# Altium PCB HamamatsuSensorBoard.PcbDoc
Units mil, origin at the board's own origin, x right, y up, seen from the top; angles counter-clockwise.
Board outline 395 x 405 mil, 2 copper layers (Top Layer, Bottom Layer); 4 components, 9 nets, 23 pads, 13 vias.
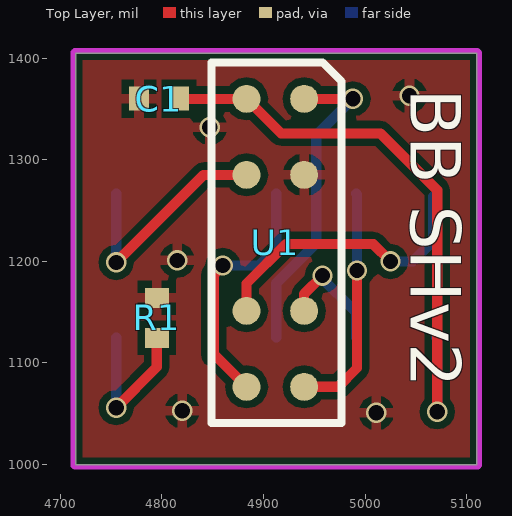
[diagram p0: Top Layer view]
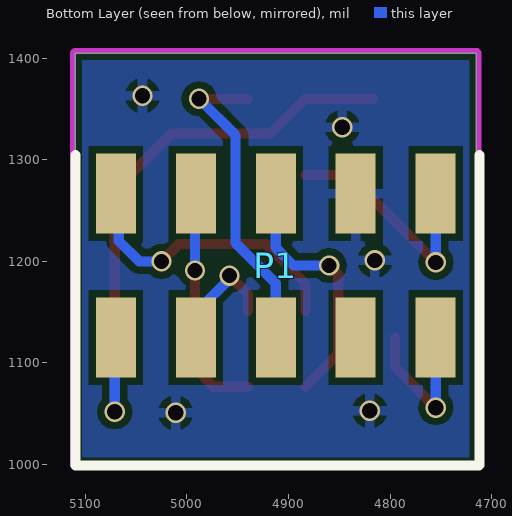
[diagram p1: Bottom Layer view, seen from below]

## Layer stack, top to bottom
Top Layer: signal copper 1.4
Dielectric: dielectric 12.6, FR-4, Dk 4.8
Bottom Layer: signal copper 1.4

## Board outline
4715,1000 5110,1000 5110,1405 4715,1405

## Design rules (kind name [scope] priority, off if disabled: settings)
Clearance [All] p1: gap=7
HoleToHoleClearance [All] p1: gap=7 allowstackedmicrovias=TRUE
MinimumSolderMaskSliver [All] p1: minsoldermaskwidth=7
PlaneClearance [All] p1: clearance=10
PolygonConnect [All] p1: connectstyle=Relief reliefconductorwidth=10 reliefentries=4 polygonreliefangle="90 Angle"
RoutingLayers [InNet('GND')] p1: top layer_v5=FALSE bottom layer_v5=FALSE
RoutingVias [All] p1: holewidth=11 width=15 viastyle="Through Hole" minholewidth=11 minwidth=15 maxholewidth=500 maxwidth=500
SilkToSilkClearance [All] p1: silktosilkclearance=4
SilkscreenOverComponentPads [All] p1: minsilkscreentomaskgap=5
SolderMaskExpansion [All] p1: expansion=4
Width [All] p1: maxlimit=50 minlimit=7 preferedwidth=10
22 further rules are at their usual default settings.

## Classes and differential pairs
component class HamamatsuSensorBoard: C1 R1 U1

## Components (designator, comment, footprint, x,y, rotation, side; value= is the part's Value field where it differs from the comment)
C1 "Cap" C_0402 4817,1360 r180 top
P1 "Header 10" 609-4377-ND 5070,1125 r180 bottom
R1 "Res2" R_0402 4795,1125 r90 top
U1 "S10226" S10226 4940,1360 r270 top

## Footprints (in the part's own frame and the unit in brackets; to place one, negate y for a bottom-side part, rotate by r counter-clockwise, add the part's x,y. Pads: shape width x height; smd on the part's side, far side on the other; paste and mask are expansions set on the pad)
609-4377-ND [mm]
  rect 1x2 smd: 1(8,3.6) 2(6,3.6) 3(4,3.6) 4(2,3.6) 5(0,3.6) 6(0,0) 7(2,0) 8(4,0) 9(6,0) 10(8,0)
  silkscreen extent -1.01,-3.2 9.09,4.57
C_0402 [mm]
  rect 0.5x0.6 smd: 1(0.005,-0.005) 2(1.005,-0.005)
R_0402 [mm]
  rect 0.5x0.6 smd: 1(-0.005,0) 2(0.995,0)
S10226 [mm]
  round 0.25 on Top Overlay: 0(2.54,-0.533)
  round 0.7 smd: 1(0,0) 2(1.9,0) 3(5.3,0) 4(7.2,0) 5(7.2,-1.44) 6(5.3,-1.44) 7(1.9,-1.44) 8(0,-1.44)
  silkscreen extent -0.91,-2.31 8.1,0.94

## Part data
C1: "Capacitor"
P1: "Header, 10-Pin"
R1: "Resistor"
U1: "Hamamatsu 1024 CMOS image sensor"

## Via types
v1: diameter 20, hole 15, Top Layer to Bottom Layer, 13 vias

## Nets (pads, with @x,y where several pads share a name; then routed paths per layer and width w, separated by ;. In a path a pad name is that pad's centre, name@x,y a point inside that pad or via, vN(x,y) a via of type N, cw(c..) or ccw(c..) an arc to the next point about the centre after c; other vN are vias at no path point)
CLK: P1.4 U1.4 | length 231.7
  Top Layer w10: U1.4 4973.54,1076.54 4992,1095 v1(4992,1191)
  Bottom Layer w10: P1.4 4992,1265.99 v1(4992,1191)
DETECT: P1.10 R1.1 | length 154.4
  Top Layer w10: v1(4755,1056) 4795,1096 R1.1
  Bottom Layer w10: v1(4755,1056) P1.10 P1.10
EOS: P1.5 U1.6 | length 290
  Top Layer w10: U1.6 4883.31,1178.31 4922,1217 5008,1217 v1(5025,1200)
  Bottom Layer w10: v1(5025,1200) 5047,1200 5067,1220 5067,1263.73 P1.5
GND: C1.2 P1.2 R1.2 U1.2
  other v1: 5011,1051 4820,1053 4815,1201 4847,1332 5043.63,1363.01
ST: P1.3 U1.5 | length 250.1
  Top Layer w10: v1(4860,1196) 4851,1187 4851,1108 4851.84,1108 U1.5
  Bottom Layer w10: v1(4860,1196) 4895,1196 4912.52,1213.52 P1.3
TRIG: P1.7 U1.3 | length 121.1
  Top Layer w10: U1.3 4940,1168 v1(4958,1186)
  Bottom Layer w10: v1(4958,1186) 4955,1186 4991.26,1149.74 P1.7
VDD: P1.1 U1.7 | length 231.8
  Top Layer w10: v1(4755,1199) 4841.2,1285.2 U1.7
  Bottom Layer w10: v1(4755,1199) P1.1 P1.1
VG: P1.8 U1.1 | length 314.3
  Top Layer w10: U1.1 v1(4988,1360)
  Bottom Layer w10: P1.8 4912.52,1178.52 4952,1218 4952,1324 v1(4988,1360)
VIDEO: C1.1 P1.6 U1.8 | length 583
  Top Layer w10: C1.1 4817,1360 U1.8 4917.31,1326 5015,1326 5071,1270 v1(5071,1052)
  Bottom Layer w10: P1.6 5071,1124 v1(5071,1052)
pads on no net: P1.9 U1.0

## Polygon pours and split planes (outlines as drawn)
GND on Bottom Layer "GND Plane" (solid, remove dead copper, pour order 4): 4696,1419 4696,985 5144,985 5155,974 5131,998 5131,1430 4698,1430 4692,1424
GND on Top Layer "GND Plane" (solid, remove dead copper, pour order 6): 4692,1419 4694,1417 4694,982 5134,982 5145,971 5126,990 5126,1416 4701,1416 4695,1422

## Keep-outs
Keep-Out Layer:
  lines w5: 4712.5,1000 ccw(c4715,1000) 4715,997.5 ; 4712.5,1000 ccw(c4715,1000) 4715,997.5 ; 4712.5,1000 4712.5,1405 ; 4712.5,1405 cw(c4715,1405) 4715,1407.5 ; 4712.5,1405 cw(c4715,1405) 4715,1407.5 ; 4715,997.5 5110,997.5 ; 4715,1407.5 5110,1407.5 ; 5110,997.5 ccw(c5110,1000) 5112.5,1000 ; 5110,997.5 ccw(c5110,1000) 5112.5,1000 ; 5110,1407.5 cw(c5110,1405) 5112.5,1405 ; 5110,1407.5 cw(c5110,1405) 5112.5,1405 ; 5112.5,1000 5112.5,1405

## Silkscreen, mask and mechanical layers (free items; w line width, h text height)
Top Overlay:
  text "BB SHv2" at 5045,1370 h50 r270